# EAGLE board aprs_v2.2 (EAGLE 9.6.2)
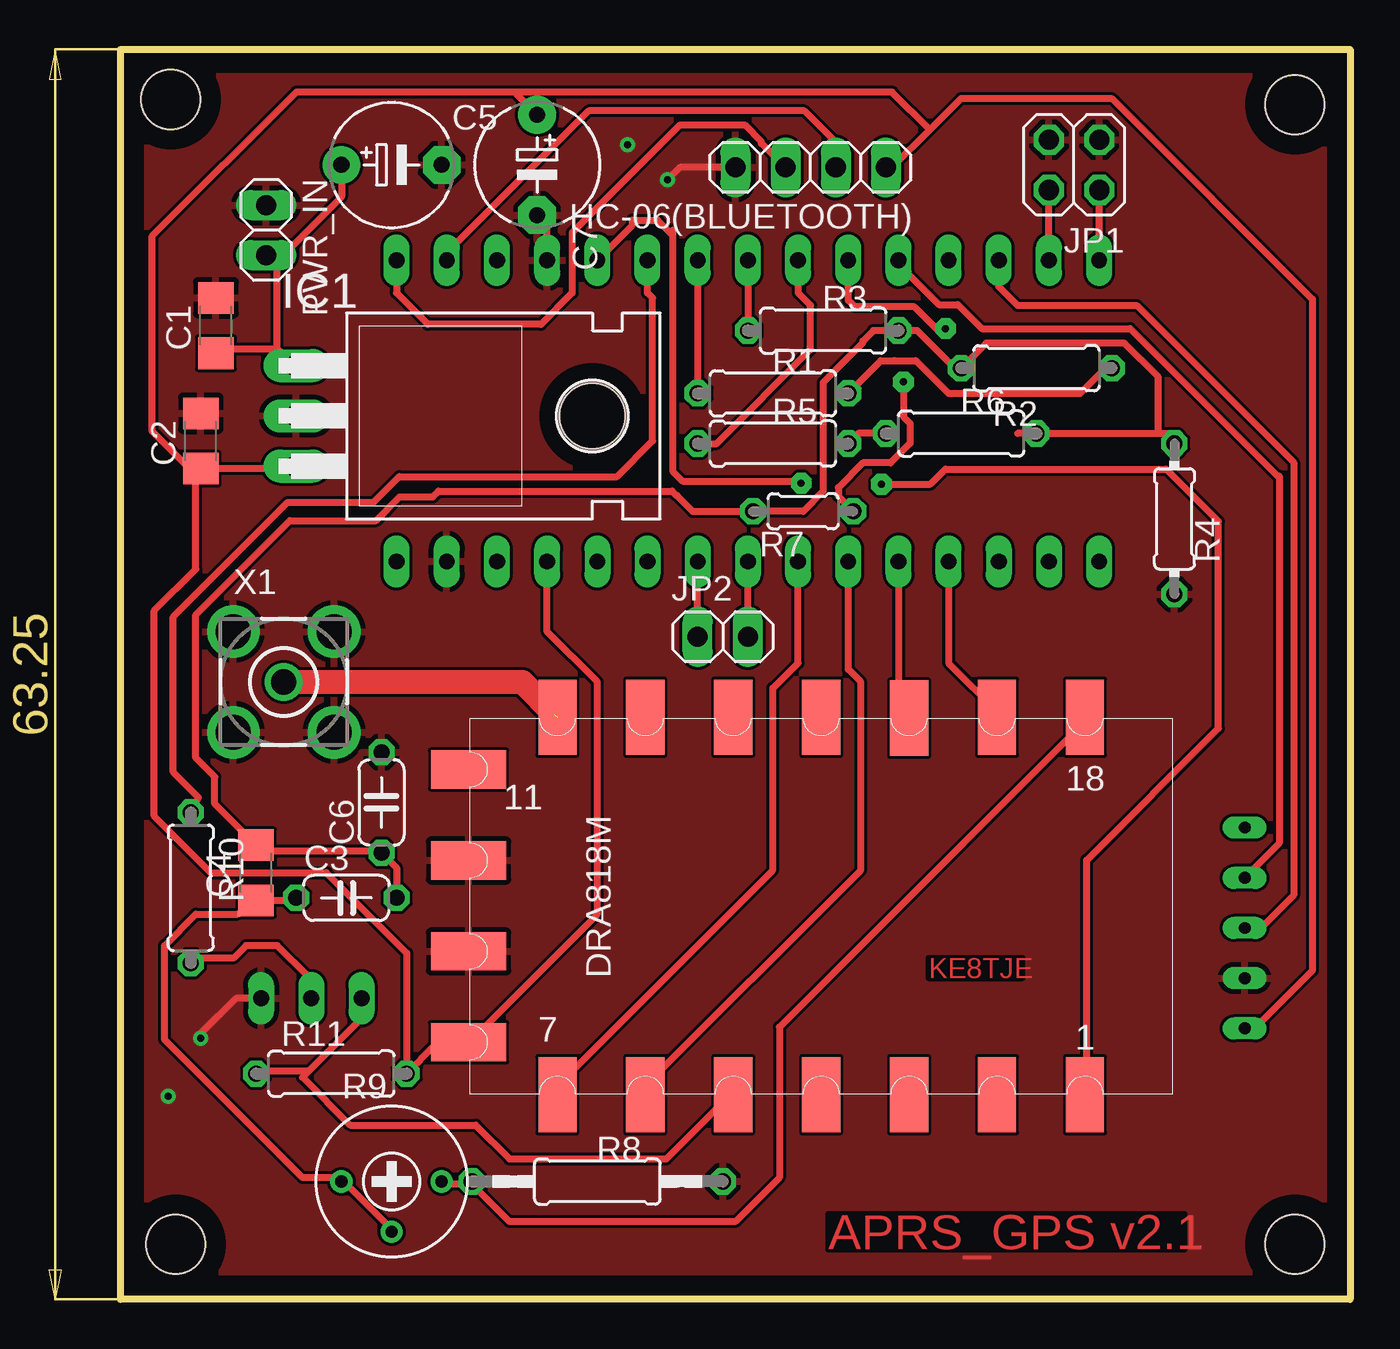
[diagram p0: board, top side]
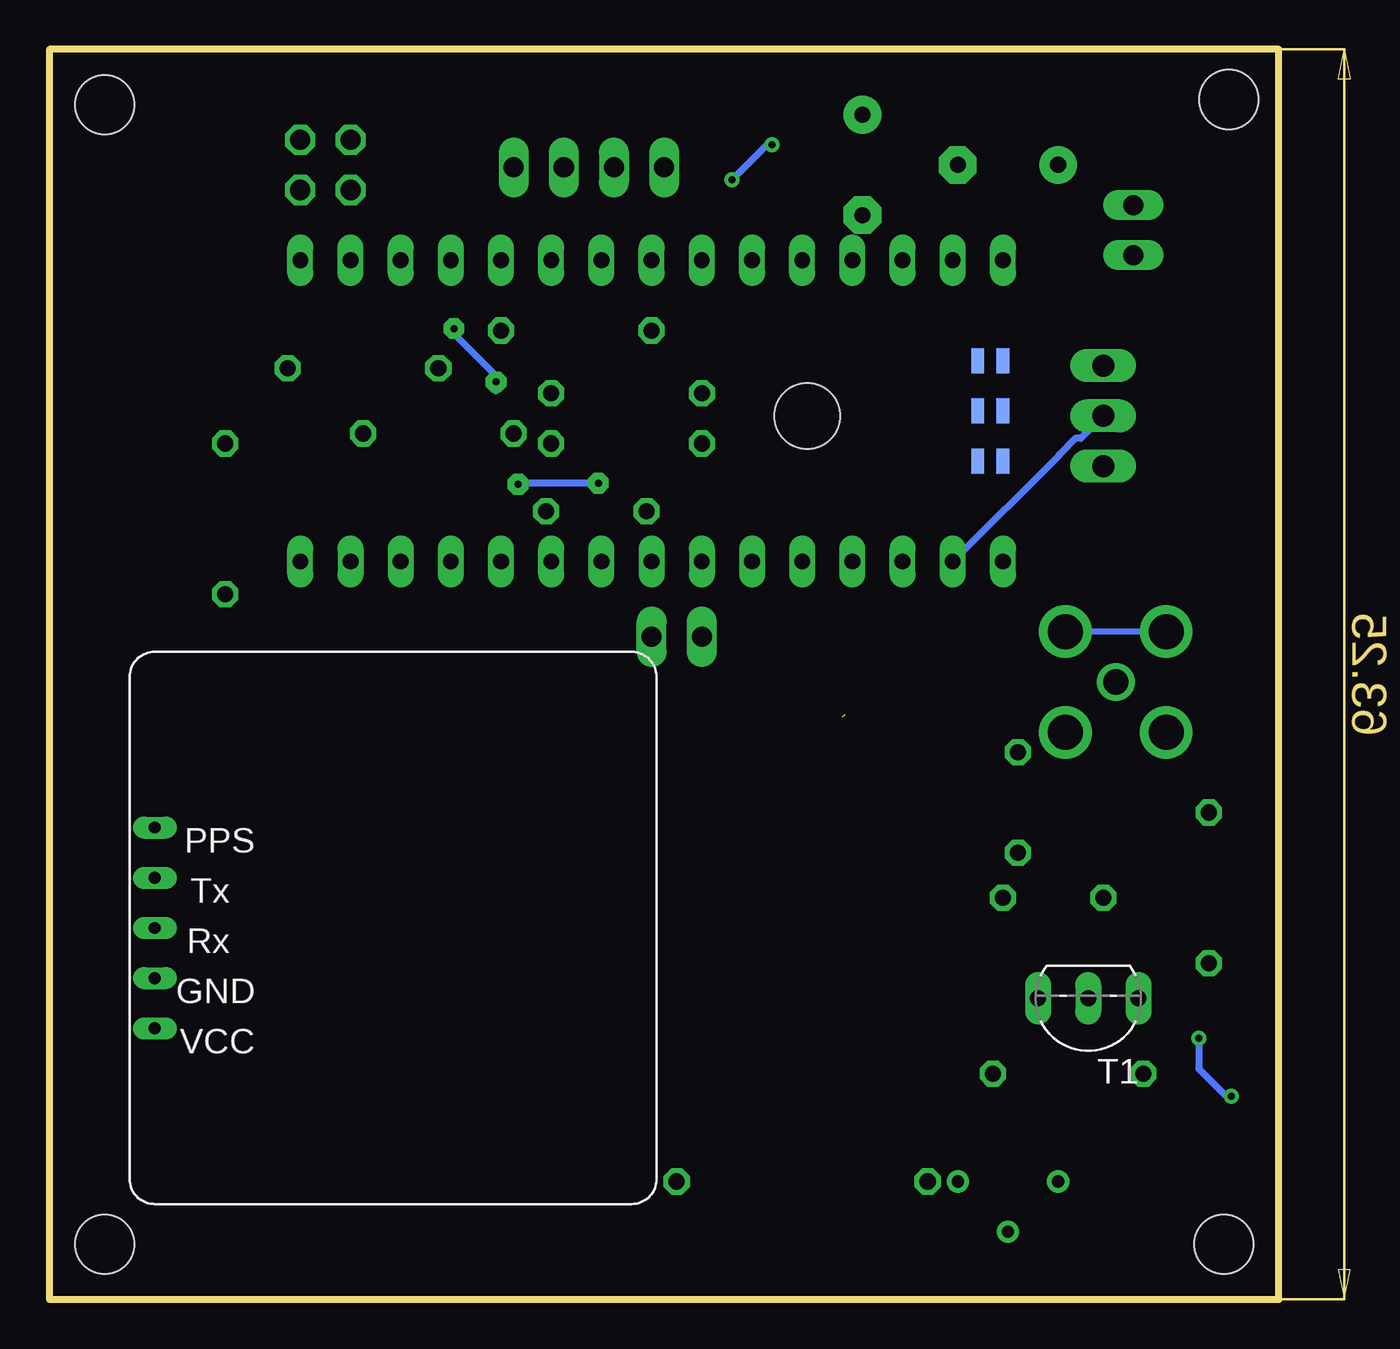
[diagram p1: board, bottom side, seen from below]

Size 62.23 x 63.25 mm. Coordinates in mm from the lower left corner, seen from the top.
Outline: 0,63.25 62.23,63.25 62.23,0 0,0 0,63.25
Copper layers (1*16): Top 0.035mm / dielectric 1.5mm / Bottom 0.035mm
Design rules "default": minimum track width 6mil, minimum drill 0.35mm, track to track 6mil, track to pad 6mil, pad to pad 6mil, via to via 6mil, smd to smd 6mil, copper to edge 40mil, drill to drill 6mil, minimum pad ring 10mil, minimum via ring 8mil, stop-mask expansion 4mil, vias tented up to drill 0mil, thermal gap 10mil
Net classes: 0 default: width 0.356 mm, clearance 0.381 mm; 1 PWR: width 0.254 mm, clearance 0.305 mm; 2 V_bat: width 0.305 mm, clearance 0.152 mm; 3 50 ohm: width 1.21 mm, clearance 0.26 mm
Holes 3 mm at 59.44,2.79 59.44,60.45 2.54,60.71 2.79,2.79

## Footprints (pad centres in the part's own frame; a part is rotated, then mirrored left to right if it is on the bottom)
C1206 = smd 1.6 x 1.8: 1 -1.4,0; 2 1.4,0
C050-024X044 = drill 0.813 octagon: 1 -2.54,0; 2 2.54,0
E5-6 = drill 0.813 pad 1.905: + -2.54,0 | drill 0.813 pad 1.905 octagon: - 2.54,0
1X04 = drill 1.016 long: 1 -3.81,0; 2 -1.27,0; 3 1.27,0; 4 3.81,0
TO220H = drill 1.118 long: 1 -2.54,-10.16; 2 0,-10.16; 3 2.54,-10.16 | hole 3.302: 0,4.826
2X02 = drill 1.016 octagon: 1 -1.27,-1.27; 2 -1.27,1.27; 3 1.27,-1.27; 4 1.27,1.27
1X02 = drill 1.016 long: 1 -1.27,0; 2 1.27,0
0207/7 = drill 0.813 octagon: 1 -3.81,0; 2 3.81,0
0204/7 = drill 0.813 octagon: 1 -3.81,0; 2 3.81,0
0204/5 = drill 0.813 octagon: 1 -2.54,0; 2 2.54,0
0207/12 = drill 0.813 octagon: 1 -6.35,0; 2 6.35,0
RTRIM3339P = drill 0.61: 1 -2.54,0; 2 0,-2.54; 3 2.54,0
TO92-EBC-OVAL = drill 0.813 long: B 0,-1.27; C 2.54,-1.27; E -2.54,-1.27
DRA818A = smd 3.81 x 1.93: 1 -9.45,-13.25; 2 -9.45,-8.8; 3 -9.45,-4.35; 4 -9.45,0.1; 5 -9.45,4.55; 6 -9.45,9; 7 -9.45,13.45; 12 9.65,13.45; 13 9.65,9; 14 9.65,4.55; 15 9.65,0.1; 16 9.6,-4.35; 17 9.65,-8.8; 18 9.65,-13.25 | smd 1.93 x 3.81: 8 -6.8,17.95; 9 -2.2,17.95; 10 2.4,17.95; 11 7,17.95
GPS_AHE = drill 0.6 long: 1 -7.62,0; 2 -5.08,0; 3 -2.54,0; 4 0,0; 5 2.54,0
NANO-NOICSP = drill 0.8 long: 3.3V -10.16,24.13; 5V -10.16,-1.27; A0 -10.16,19.05; A1 -10.16,16.51; A2 -10.16,13.97; A3 -10.16,11.43; A4 -10.16,8.89; A5 -10.16,6.35; A6 -10.16,3.81; A7 -10.16,1.27; AREF -10.16,21.59; D2 5.08,1.27; D3 5.08,3.81; D4 5.08,6.35; D5 5.08,8.89; D6 5.08,11.43; D7 5.08,13.97; D8 5.08,16.51; D9 5.08,19.05; D10 5.08,21.59; D11 5.08,24.13; D12 5.08,26.67; D13 -10.16,26.67; GND -10.16,-6.35; GND1 5.08,-1.27; RAW -10.16,-8.89; RST -10.16,-3.81; RST1 5.08,-3.81; RX1 5.08,-6.35; TX0 5.08,-8.89 | smd 1.27 x 0.635: P$1 -5.08,-8.89; P$2 -5.08,-7.62; P$3 -2.54,-7.62; P$4 0,-7.62; P$5 -2.54,-8.89; P$6 0,-8.89
BU-SMA-V = drill 1.27: 1 0,0 | drill 1.778: 2 -2.55,2.55; 3 2.55,2.55; 4 2.55,-2.55; 5 -2.55,-2.55

## Placement (x,y rotation side)
C1  10u  [C1206]  4.83,49.28 90 top
C2  10u  [C1206]  4.06,43.43 90 top
C3  4.7u  [C050-024X044]  11.43,20.32 0 top
C4  4.7u  [C1206]  6.86,21.59 90 top
C5  [E5-6]  13.72,57.4 0 top
C6  100n  [C050-024X044]  13.21,25.15 90 top
C7  [E5-6]  21.08,57.4 270 top
HC-06(BLUETOOTH)  [1X04]  34.92,57.28 180 top
IC1  7805T  [TO220H]  19.05,44.7 270 top
JP1  [2X02]  48.26,57.4 180 top
JP2  [1X02]  30.48,33.53 0 top
PWR_IN  [1X02]  7.37,54.1 270 top
R1  6.2k  [0207/7]  33.02,45.85 0 top
R2  2k  [0207/7]  46.35,47.12 180 top
R3  3.9k  [0207/7]  35.56,49.02 0 top
R4  270  [0204/7]  53.34,39.5 270 top
R5  1.2k  [0207/7]  33.02,43.31 0 top
R6  1k  [0207/7]  42.54,43.81 0 top
R7  1k  [0204/5]  34.54,39.88 180 top
R8  1k  [0207/12]  24.13,5.97 0 top
R9  1k  [RTRIM3339P]  13.72,5.97 0 top
R10  1k  [0207/7]  3.56,20.83 270 top
R11  1k  [0207/7]  10.67,11.43 0 top
T1  2N2222  [TO92-EBC-OVAL]  9.65,13.97 180 bottom
U$1  [DRA818A]  35.56,19.81 90 top
U$3  GT-U7  [GPS_AHE]  56.9,21.34 90 bottom
U$4  NANO-2  [NANO-NOICSP]  22.86,47.5 90 bottom
X1  BU-SMA-V  [BU-SMA-V]  8.25,31.24 0 top

## Library data of the parts
C1-C7 = rcl; SPICEPREFIX: C
HC-06(BLUETOOTH) JP1 JP2 PWR_IN = pinhead
IC1 T1 = adafruit
R1-R8 R10 R11 = rcl; SPICEPREFIX: R
R9 = rcl; SPICEMODEL: X; SPICEPREFIXL: POT
U$1 = dorji
U$3 = GPS_ahe
U$4 = Arduino-clone
X1 = con-coax; OC_FARNELL: unknown; OC_NEWARK: unknown

## Nets
GND [V_bat]: C1.2 C2.2 C5.- C6.2 C7.- HC-06(BLUETOOTH).4 IC1.2 JP1.1 JP1.3 PWR_IN.1 R4.2 R8.2 T1.E U$1.9 U$1.10 U$3.2 U$4.GND U$4.GND1 X1.2 X1.3 X1.4 X1.5
GPS_RX: U$3.4 U$4.D8
GPS_TX: U$3.3 U$4.D10
MC_APRS_OUT: R8.1 R9.3 U$1.18
MU_RX_1: U$1.17 U$4.A0
MU_TX_1: U$1.16 U$4.A1
N$1 [50 ohm]: U$1.12 X1.1
N$2: C1.1 C5.+ IC1.1 PWR_IN.2
N$3: HC-06(BLUETOOTH).2 U$4.RX1
N$4: R1.1 U$4.D4
N$5: R3.1 U$4.D5
N$6: R5.1 U$4.D6
N$7: R7.1 U$4.D7
N$8: R1.2 R2.1
N$9: R5.2 R6.1
N$10: C3.2 C4.2 C6.1 R2.2 R3.2 R4.1 R6.2 R7.2
N$11: C3.1 C4.1 R9.1 R9.2
N$12: R11.1 T1.C U$1.5
N$13: HC-06(BLUETOOTH).3 U$4.TX0
N$14: R10.2 T1.B
N$15: JP1.2 U$4.D12
N$16: JP1.4 U$4.D11
N$17: JP2.1 U$4.A5
N$18: JP2.2 U$4.A4
RADIO_OUTPUT_POWER: U$1.7 U$4.A3
RADIO_PTT: R10.1 U$4.D3
RADIO_SQL: U$1.1 U$4.D2
RADIO_WAKE: U$1.6 U$4.A2
TO_DTMF: U$1.3
VCC: C2.1 C7.+ HC-06(BLUETOOTH).1 IC1.3 R11.2 U$1.8 U$3.1 U$4.5V

## Tracks (layer width: path | path; a pad name or v marks a point on that pad's centre or on a via)
GND  (via drill 0.35)
  Top 0.356: HC-06(BLUETOOTH).4 28.32,57.28 v27.69,56.64 | U$4.GND1 21.59,54.36 C7.- | T1.E 5.84,15.24 4.06,13.46 v4.06,13.21
  Bottom 0.305: X1.2 X1.3
  Bottom 0.356: v27.69,56.64 25.91,58.42 v25.65,58.42 | IC1.2 10.03,43.56 10.31,43.56 11.12,42.74 11.12,42.72 U$4.GND | v4.06,13.21 4.06,11.68 2.54,10.16 v2.41,10.29
  pour Top: -1.27,66.17 64.77,66.17 64.77,-13.84 -1.27,-13.84
GPS_RX
  Top 0.356: 39.54,52.2 39.77,51.96 | 39.77,51.96 41.41,50.33 42.38,50.33 43.59,49.12 51.1,49.12 58.57,41.66 58.64,41.66 58.64,23.08 U$3.4 | U$4.D8 39.77,52.17 39.77,51.96
GPS_TX
  Top 0.356: U$3.3 57.15,18.86 57.78,18.86 59.37,20.45 59.37,42.35 51.43,50.29 45.4,50.29 44.45,51.24 U$4.D10
MC_APRS_OUT
  Top 0.356: 17.78,5.84 16.51,5.84 R9.3 | 17.78,5.84 19.69,3.94 31.11,3.94 33.34,6.16 33.34,13.78 48.89,29.34 U$1.18 | 17.78,5.84 R8.1
MU_RX_1
  Top 0.356: U$1.17 44.45,29.65 41.91,32.19 U$4.A0
MU_TX_1
  Top 0.356: U$1.16 39.69,29.65 39.37,29.97 U$4.A1
N$1  (1 unrouted)
  Top 1.21: X1.1 20.32,31.24 21.98,29.59
N$2
  Top 0.356: 7.94,48.07 4.89,48.07 C1.1 | 7.94,48.07 8.89,47.12 IC1.1 7.94,48.07 | 7.94,48.07 7.94,52.26 PWR_IN.2 8.22,52.83 11.18,55.79 C5.+
N$3
  Top 0.356: HC-06(BLUETOOTH).2 36.2,58.55 34.61,60.13 23.69,60.13 16.51,52.96 U$4.RX1
N$4
  Top 0.356: U$4.D4 R1.1
N$5
  Top 0.356: U$4.D5 R3.1
N$6
  Top 0.356: R5.1 30.16,43.31 34.92,48.07 34.92,50.29 34.29,50.93 U$4.D6
N$7  (via drill 0.35 pad 1.05)
  Top 0.356: v41.76,49.12 41.51,48.88 40.14,50.24 37.13,50.24 36.83,50.55 U$4.D7 | R7.1 36.32,40.64 36.32,41.07 37.58,42.33 38.97,42.33 39.95,43.31 39.95,44.32 39.62,44.65 v39.62,46.42
  Bottom 0.356: v41.76,49.12 41.76,48.87 39.62,46.74 v39.62,46.42 39.62,45.97
N$8
  Top 0.356: R2.1 49.85,47.12 48.58,45.85 41.91,45.85 40.25,47.51 39.17,47.51 39.17,47.5 38.48,47.5 R1.2
N$9
  Top 0.356: R6.1 37.34,43.81 R5.2
N$10
  Top 0.356: 45.4,43.81 R6.2 52.52,43.81 | 52.52,43.81 53.02,43.81 53.02,43.31 R4.1 | 52.52,43.81 52.52,46.67 50.8,48.39 43.81,48.39 R2.2 42.23,47.12 40.32,49.02 R3.2 38.1,49.02 37.57,48.49 37.57,48.4 35.56,46.39 35.56,40.88 34.55,39.88 R7.2 28.96,39.88 28.17,40.66 28.14,40.66 27.91,40.89 16.09,40.89 15.8,40.6 14.12,40.6 12.92,39.4 8.57,39.4 3.81,34.65 3.81,27.4 4.78,26.44 4.78,25.07 C4.2 6.97,22.67 13.14,22.67 C6.1 13.97,21.84 C3.2
N$11
  Top 0.356: R9.2 13.65,3.62 11.43,5.84 R9.1 11.11,6.16 9.21,6.16 2.22,13.14 2.22,17.91 3.81,19.49 5.92,19.49 C4.1 8.76,20.19 C3.1
N$12
  Top 0.356: 9.53,11.56 6.86,11.56 R11.1 | 9.53,11.56 9.21,11.24 11.62,8.83 17.97,8.83 19.69,7.11 27.62,7.11 30.8,10.29 U$1.5 | 9.53,11.56 10.48,12.51 12.06,14.1 12.06,15.05 T1.C
N$13
  Top 0.356: HC-06(BLUETOOTH).3 32.44,58.5 32.44,58.59 31.62,59.4 28.28,59.4 22.86,53.98 22.86,50.93 21.27,49.34 15.56,49.34 13.97,50.93 U$4.TX0
N$14
  Top 0.356: R10.2 3.68,17.27 5.71,17.27 6.35,17.91 7.94,17.91 9.53,16.32 9.53,15.37 T1.B
N$15
  Top 0.356: U$4.D12 JP1.2
N$16
  Top 0.356: U$4.D11 JP1.4
N$17
  Top 0.356: JP2.1 U$4.A5
N$18
  Top 0.356: JP2.2 U$4.A4
RADIO_OUTPUT_POWER
  Top 0.356: U$1.7 21.91,10.6 33.02,21.72 33.02,30.92 34.29,32.19 U$4.A3
RADIO_PTT
  Top 0.356: R10.1 3.94,25.4 2.67,26.67 2.67,34.54 8.45,40.32 12.8,40.32 14.11,41.63 25.12,41.63 26.92,43.43 26.92,50.67 26.67,50.93 U$4.D3
RADIO_SQL  (via drill 0.35 pad 1.05)
  Top 0.356: U$1.1 48.89,10.6 48.89,22.22 55.56,28.89 55.56,39.37 52.92,42.01 41.75,42.01 40.99,41.25 v38.51,41.25 | 27.94,54.1 27.94,53.85 | 27.94,53.85 27.94,41.91 28.45,41.4 34.54,41.4 v34.44,41.3 | U$4.D2 25.91,54.36 25.91,54.61 27.18,54.61 27.94,53.85
  Bottom 0.356: v34.44,41.3 38.45,41.3 v38.51,41.25
RADIO_WAKE
  Top 0.356: U$1.6 26.35,10.6 37.46,21.72 37.46,31.24 36.83,31.88 U$4.A2
VCC
  Top 0.356: C2.1 4.13,42.04 8.89,42.04 IC1.3 | U$1.8 17.78,13.14 24.13,19.49 24.13,31.24 21.59,33.78 U$4.5V | U$1.8 17.46,12.83 15.87,12.83 R11.2 14.48,17.53 10.41,21.59 4.57,21.59 1.71,24.45 1.71,34.86 3.81,36.96 3.81,41.72 C2.1 | U$1.8 17.61,13.76 | 40.96,59.18 39.05,57.28 HC-06(BLUETOOTH).1 | 40.96,59.18 42.54,60.77 50.16,60.77 60.33,50.61 60.33,16.64 57.47,13.78 57.15,13.78 U$3.1 | 19.94,61.09 39.05,61.09 40.96,59.18 | 19.94,61.09 8.89,61.09 1.59,53.78 1.59,43.94 3.49,42.04 3.81,42.04 C2.1 | C7.+ 19.94,61.09

## Text on the board
Top: KE8TJE | APRS_GPS v2.1